# Altium PCB LittleFOC-pcb-0.0.2.PcbDoc
Units mil, origin at the board's own origin, x right, y up, seen from the top; angles counter-clockwise.
Board outline 670.03 x 1010.03 mil, 2 copper layers (Top Layer, Bottom Layer); 26 components, 35 nets, 119 pads, 19 vias.
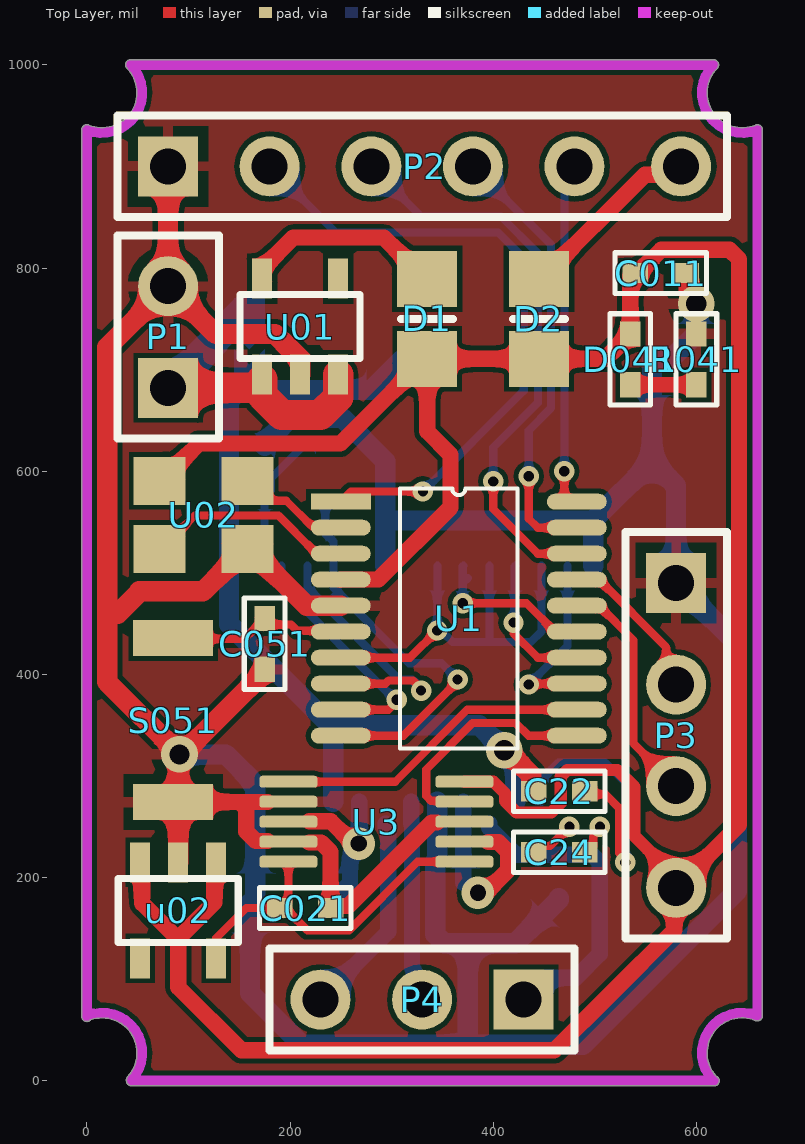
[diagram p0: Top Layer view]
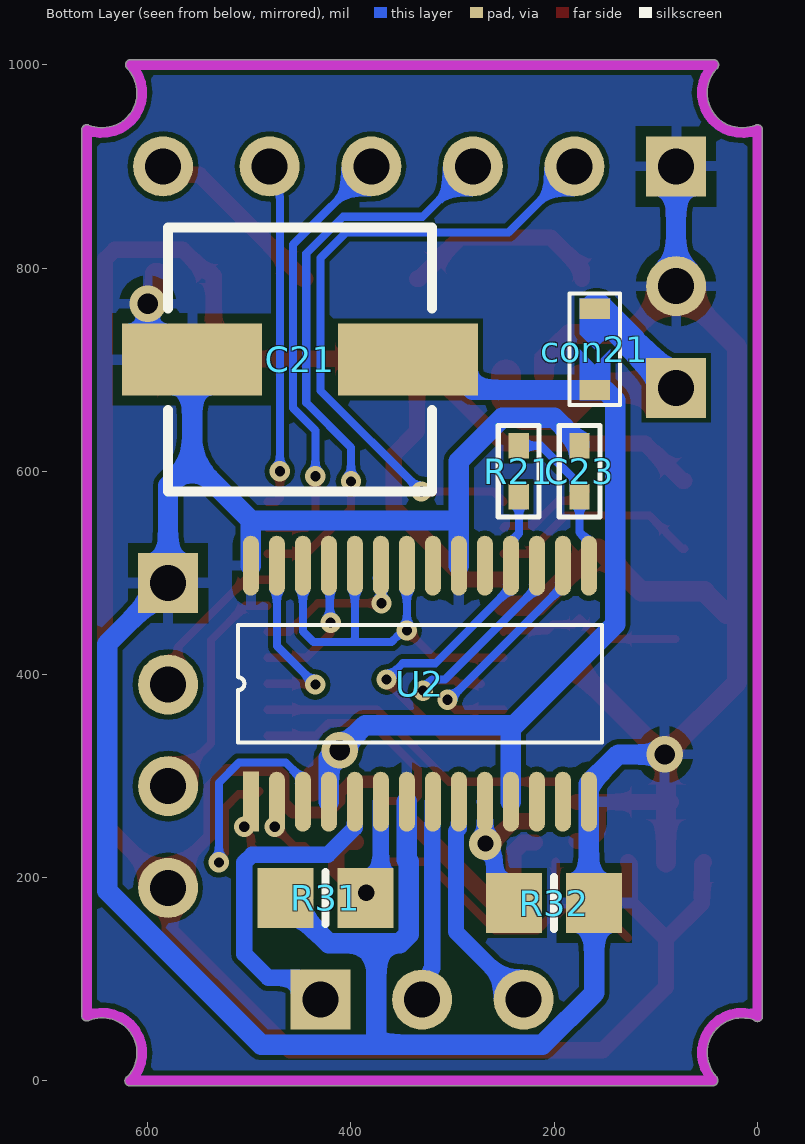
[diagram p1: Bottom Layer view, seen from below]

## Layer stack, top to bottom
Top Solder: solder mask 0.4, Solder Resist, Dk 3.5
Top Layer: signal copper 1.4
Dielectric 1: dielectric 12.6, FR-4, Dk 4.8
Bottom Layer: signal copper 1.4
Bottom Solder: solder mask 0.4, Solder Resist, Dk 3.5

## Board outline
3.71,59.99 cw(c0,63.37) -5.01,63.37 -5.01,936.06 cw(c0,936.06) 1.92,940.69 ccw(c15.04,972.44) 49.39,972.44 ccw(c15.04,972.44) 39.6,996.46 ccw(c15.04,972.44) 39.57,996.49 39.6,996.46 cw(c43.16,1000) 38.14,1000 cw(c43.16,1000) 43.19,1005.01 616.84,1005.01 cw(c616.84,1000) 621.86,1000 cw(c616.84,1000) 620.41,996.47 cw(c644.96,972.44) 620.43,996.49 620.41,996.47 ccw(c644.96,972.44) 658.08,940.69 cw(c660,936.06) 665.01,936.06 cw(c660,936.06) 665.01,936.06 665.01,63.94 cw(c660,63.94) 658.08,59.31 ccw(c644.96,27.56) 619.38,4.63 cw(c617.45,0) 622.46,0 cw(c617.45,0) 617.45,-5.01 611.22,-5.01 cw(c611.22,0) 611.22,-5.01 611.22,-5.02 ccw(c611.22,0) 611.26,-5.01 611.22,-5.02 44.04,-5.02 cw(c44.04,0) 39.04,0.47 cw(c44.04,0.93) 40.34,4.32 ccw(c15.04,27.56) 49.39,27.56 ccw(c15.04,27.56)

## Design rules (kind name [scope] priority, off if disabled: settings)
Clearance chip_pin [HasFootprint('QFN24')] p1: gap=5 ignorepadtopadclearanceinfootprint=FALSE
Clearance [All] p2: gap=5 ignorepadtopadclearanceinfootprint=FALSE
HoleSize [All] p1: absolutevalues=TRUE maxlimit=20 minlimit=10 maxpercent=80.000 minpercent=20.000
PolygonConnect [All] p1: connectstyle=Relief reliefconductorwidth=10 reliefentries=4 polygonreliefangle="90 Angle" airgapwidth=10
RoomDefinition LittleFOC-pcb-0.0.2 [InComponentClass('LittleFOC-pcb-0.0.2')] p1: confinementstyle=ConfineIn formatcopy=TRUE lockcomponents=FALSE outline 0,0 660,0 660,1000 0,1000
RoutingVias [All] p1: holewidth=10 width=20 viastyle="Through Hole" minholewidth=10 minwidth=20 maxholewidth=20 maxwidth=40
SolderMaskExpansion [All] p1: expansion=4 istentingtop=FALSE
Width VCC [InNet('VCC')or InNet('VCC_in')] p1: maxlimit=30 minlimit=20 preferedwidth=20
Width GND [InNet('GND')] p2: maxlimit=30 minlimit=8 preferedwidth=20
Width Power [(InNet('OUTPUT1') OR InNet('OUTPUT2') OR InNet('OUTPUT3') OR InNet('3V3')  OR InNet('PGND1') OR InNet('PGND3')  OR InNet('NetC011_1') OR InNet('NetD1_1')  OR InNet('NetD2_1'))] p3: maxlimit=20 minlimit=10 preferedwidth=15
Width signal [All] p4: maxlimit=15 minlimit=8 preferedwidth=8
29 further rules are at their usual default settings.

## Components (designator, comment, footprint, x,y, rotation, side; value= is the part's Value field where it differs from the comment)
C011 "Cap" 0402R 565,795 r0 top value=10uF
C021 "Cap" 0402R 215,170 r0 top value=1uF
C21 "Cap" XT_100UF_25V 450,710 r0 bottom locked value=100uF/25V
C22 "Cap" 0402R 465,285 r0 top value=0.1uF
C23 "Cap" 0402R 175,600 r90 bottom value=0.47uF
C24 "Cap" 0402R 465,225 r180 top value=0.01uF
C051 "Cap" 0402R 175,430 r270 top value=0.1μF
con21 "connector" connector 160,720 r270 bottom
D1 "Diode" 6-0805_M 335,750 r270 top
D2 "Diode" 6-0805_M 445,750 r270 top
D041 "LED2" 0402R 535,710 r270 top
P1 "Header 2" HDR1X2 80,682.12 r90 top
P2 "Header 6" HDR1X6 80,900 r0 top locked
P3 "Header 4" HDR1X4 580,490 r270 top locked
P4 "Header 3" HDR1X3 430,80 r180 top locked
R21 "Res1" 0402R 235,600 r270 bottom value=10K
R31 "Res1" 6-0805_M 425,180 r0 bottom value="20m 0.1W"
R32 "Res1" 6-0805_M 200,175 r180 bottom value="20m 0.1W"
R041 "Res1" 0402R 600,710 r270 top value=1K
S051 "SW-PB" MPTCFP2 85,355 r90 top
U01 "SPX3819" SOT23-5 172.6,695 r180 top
U1 "STM32G030F6P6" TSSOP20 250,570 r0 top
u02 "LP3992-15B5F" SOT23-5 127.4,215 r0 top
U02 "OSC 16Mhz" SMD3225 115,557.08 r0 top
U2 "DRV8313" TSSOP28 498.54,274.72 r90 bottom
U3 "INA2181A2IDSQR" VSSOP-10pin 285,255 r0 top

## Footprints (in the part's own frame and the unit in brackets; to place one, negate y for a bottom-side part, rotate by r counter-clockwise, add the part's x,y. Pads: shape width x height; smd on the part's side, far side on the other; paste and mask are expansions set on the pad)
6-0805_M [mm] "Chip Resistor, Body 2.0x1.2mm, IPC Low Density"
  rect 1.4x1.5 smd: 1(-1,0) 2(1,0)
  silkscreen extent 0,-0.65 0,0.65, body extent -1.07,-0.7 1.07,0.7, height 0.7
0402R [mil]
  rect 25x20 smd: 1(-25,0) 2(25,0)
  silkscreen extent -45,-20 45,20
connector [mil]
  rect 20x30 smd: 1(-40,0) 2(40,0)
  Top Layer region: -50,15 -50,-15 -15,-15 0,0 -15,15
  Top Layer region: 50,15 50,-15 0,-15 15,0 0,15
  silkscreen extent -55,-25 55,25
HDR1X2 [mm] "Connector; Header; 2 Position"
  rect 1.5x1.5 hole 0.9: 1(0,0)
  round 1.5 hole 0.9: 2(2.54,0)
  silkscreen extent -1.27,-1.27 3.81,1.27
HDR1X3 [mm] "Connector; Header; 3 Position"
  rect 1.5x1.5 hole 0.9: 1(0,0)
  round 1.5 hole 0.9: 2(2.54,0) 3(5.08,0)
  silkscreen extent -1.27,-1.27 6.35,1.27
HDR1X4 [mm] "Connector; Header; 4 Position"
  rect 1.5x1.5 hole 0.9: 1(0,0)
  round 1.5 hole 0.9: 2(2.54,0) 3(5.08,0) 4(7.62,0)
  silkscreen extent -1.27,-1.27 8.89,1.27
HDR1X6 [mm] "Connector; Header; 6 Position"
  rect 1.5x1.5 hole 0.9: 1(0,0)
  round 1.5 hole 0.9: 2(2.54,0) 3(5.08,0) 4(7.62,0) 5(10.16,0) 6(12.827,0)
  silkscreen extent -1.27,-1.27 13.97,1.27
MPTCFP2 [mm]
  rect 0.9x2 smd: 1(-2.05,0) 2(2.05,0)
SMD3225 [mm]
  rect 1.3x1.2 smd: 1(-1.1,-0.85) 2(1.1,-0.85) 3(1.1,0.85) 4(-1.1,0.85)
SOT23-5 [mm]
  rect 0.5x1 smd: 1(0,0) 2(-0.95,0) 3(-1.9,0) 4(-1.9,-2.4) 5(0,-2.4)
  silkscreen extent -2.45,-2 0.55,-0.4
TSSOP20 [mm]
  rect 1.5x0.4 smd: 1(0,0)
  oval 1.5x0.4 smd: 2(0,-0.65) 3(0,-1.3) 4(0,-1.95) 5(0,-2.6) 6(0,-3.25) 7(0,-3.9) 8(0,-4.55) 9(0,-5.2) 10(0,-5.85) 11(5.9,-5.85) 12(5.9,-5.2) 13(5.9,-4.55) 14(5.9,-3.9) 15(5.9,-3.25) 16(5.9,-2.6) 17(5.9,-1.95) 18(5.9,-1.3) 19(5.9,-0.65) 20(5.9,0)
  silkscreen extent 1.48,-6.18 4.42,0.33
TSSOP28 [mm]
  rect 1.5x0.4 smd: 1(0,0)
  oval 1.5x0.4 smd: 2(0,-0.65) 3(0,-1.3) 4(0,-1.95) 5(0,-2.6) 6(0,-3.25) 7(0,-3.9) 8(0,-4.55) 9(0,-5.2) 10(0,-5.85) 11(0,-6.5) 12(0,-7.15) 13(0,-7.8) 14(0,-8.45) 15(5.9,-8.45) 16(5.9,-7.8) 17(5.9,-7.15) 18(5.9,-6.5) 19(5.9,-5.85) 20(5.9,-5.2) 21(5.9,-4.55) 22(5.9,-3.9) 23(5.9,-3.25) 24(5.9,-2.6) 25(5.9,-1.95) 26(5.9,-1.3) 27(5.9,-0.65) 28(5.9,0)
  silkscreen extent 1.48,-8.78 4.42,0.33
VSSOP-10pin [mm]
  rrect50% 1.45x0.3 smd: 1(-2.2,1) 2(-2.2,0.5) 3(-2.2,0) 4(-2.2,-0.5) 5(-2.2,-1) 6(2.2,-1) 7(2.2,-0.5) 8(2.2,0) 9(2.2,0.5) 10(2.2,1)
XT_100UF_25V [mm]
  rect 3.5x1.8 smd: 1(-2.7,0) 2(2.7,0)
  silkscreen extent -3.3,-3.3 3.3,3.3

## Part data
C011 C021 C21 C22 C23 C24 C051: library part "Cap Semi", "Capacitor (Semiconductor SIM Model)", LatestRevisionDate=29-May-2009, LatestRevisionNote="IPC-7351 Footprint Added.", PackageDescription="Chip Capacitor", PackageReference=C1206, Published=8-Jun-2000, Publisher="Altium Limited"
D1 D2: "Default Diode", Code_JEDEC=DO-214-AB, LatestRevisionDate=17-Jul-2002, LatestRevisionNote="Re-released for DXP Platform.", PackageDescription="DO-214-AB/SMC; 2 C-Bend Leads; Body 7.9 x 5.9 mm, inc. leads (LxW)", PackageReference=SMC, PackageVersion=Sep-1996, Published=8-Jun-2000, Publisher="Altium Limited"
D041: "Typical RED, GREEN, YELLOW, AMBER GaAs LED", LatestRevisionDate=17-Jul-2002, LatestRevisionNote="Re-released for DXP Platform.", PackageDescription="SM LED; 2 Flat Leads", PackageReference=3.2X1.6X1.1, PackageVersion=Feb-2002, Published=8-Jun-2000, Publisher="Altium Limited"
P1: "Header, 2-Pin", LatestRevisionDate=17-Jul-2002, LatestRevisionNote="Re-released for DXP Platform.", Publisher="Altium Limited"
P2: "Header, 6-Pin", LatestRevisionDate=17-Jul-2002, LatestRevisionNote="Re-released for DXP Platform.", Publisher="Altium Limited"
P3: "Header, 4-Pin", LatestRevisionDate=17-Jul-2002, LatestRevisionNote="Re-released for DXP Platform.", Publisher="Altium Limited"
P4: "Header, 3-Pin", LatestRevisionDate=17-Jul-2002, LatestRevisionNote="Re-released for DXP Platform.", Publisher="Altium Limited"
R21 R31 R32 R041: "Resistor", LatestRevisionDate=17-Jul-2002, LatestRevisionNote="Re-released for DXP Platform.", PackageDescription="Axial Device, Thru-Hole; 2 Leads; 0.3 in Pin Spacing", PackageReference=AXIAL-0.3, Published=8-Jun-2000, Publisher="Altium Limited"
S051: "Switch", LatestRevisionDate=17-Jul-2002, LatestRevisionNote="Re-released for DXP Platform.", PackageDescription="Switch; 2 Leads", PackageReference=SPST-2, Published=24-Mar-1999, Publisher="Altium Limited"

## Via types
v1: diameter 20, hole 10, Top Layer to Bottom Layer, 14 vias
v2: diameter 36, hole 20, Top Layer to Bottom Layer, 3 vias
v3: diameter 32, hole 16, Top Layer to Bottom Layer, 2 vias

## Nets (pads, with @x,y where several pads share a name; then routed paths per layer and width w, separated by ;. In a path a pad name is that pad's centre, name@x,y a point inside that pad or via, vN(x,y) a via of type N, cw(c..) or ccw(c..) an arc to the next point about the centre after c; other vN are vias at no path point)
1V5: C021.1 u02.5 U3.5 U3.6 | length 344.1
  Top Layer w8: 127.4,140.51 156.89,170 C021.1 ; U3.5 198.39,176 192.39,170 C021.1 ; U3.6 325.63,215.63 257.94,147.94 217.06,147.94 201,164 196,164 C021.1
3V3: C011.1 D1.2 D2.2 D041.1 P3.4 U1.4 u02.1 u02.3 U02.4 U3.10 | length 2811.9
  Top Layer w12: U3.10 371.71,294.28 400.3,294.28 411.62,282.95 411.62,275.32 422.94,264 457.06,264 466.5,273.44 466.5,299.56 472.94,306 522.16,306 539,289.16 539,241 580,200 P3.4
  Top Layer w16: u02.3 54.44,213.16 54.44,174.8 90,139.24 ; U02.4 73.66,590.55 110.28,627.17 249.57,627.17 333.03,710.63 D1.2 ; 89.62,139.62 125.56,175.56 125.56,213.16 u02.1 ; 90,135 90,92.2 152.2,30 460,30 515.88,85.88 578.15,148.15 578.15,188.15 P3.4 585,195 642,252 642,808.63 632.63,818 565.5,818 544.5,797 542,797 C011.1 537.5,795 535,792.5 535,732.5 533,730.5 530.5,730.5 510.63,710.63 D2.2 D1.2 ; U1.4 250.13,493.35 287.02,493.35 358,564.34 358,616.2 335,639.2 D1.2
ADC1_IN4: U1.11 U3.9 | length 238.5
  Top Layer w8: U3.9 370.78,275.52 338.76,275.52 334.07,280.2 334.07,306.47 379.6,352 399.48,352 399.76,352.28 422.12,352.28 434.71,339.68 U1.11
ADC1_IN5: U1.12 U3.1 | length 313.3
  Top Layer w8: U3.1 303.58,294.37 374.49,365.28 U1.12
BLDC_EN: U1.7 U2.22 U2.24 U2.26 | length 422
  Top Layer w8: U1.7 318.21,416.46 v1(345,443.25)
  Bottom Layer w8: U2.22 v1(345,443.25) 348.25,443.25 353.95,437.54 354.41,437.54 359.95,432 399.18,432 ; U2.24 396.18,435 399.18,432 ; U2.26 447.36,442.36 437,432 399.18,432
GND: C011.2 C021.2 C21.2 C23.2 C051.2 P1.2 P2.1 P3.1 R31.2 R32.2 R041.1 S051.1 U01.2 U1.5 u02.2 U02.2 U2.7 U2.14 U2.20 U2.28 U3.2 U3.4 U3.8 | length 4275.4
  Top Layer w16: S051.1 85.2,274.49 90,274.49 150,274.49 ; U3.4@177.84,236.09 166.19,236.09 156.84,245.44 156.84,267.65 150,274.49 ; U3.2@177.84,274.49 150,274.49 ; U3.4@218.93,234.54 230.58,234.54 239.93,225.19 239.93,170.07 C021.2 242,172 257.2,172 339.42,254.22 U3.8@344.56,254.22
  Top Layer w20: 30.63,459.64 51.71,480.72 51.71,481.71 114.43,481.71 156.34,523.62 U02.2 160.28,523.62 216.25,467.64 U1.5 ; P2.1 P1.2 ; u02.2 90,274.49 v2@90,320 ; C051.2 175,402.5 93.75,321.25 v2(91.25,321.25) ; U01.2 210,710.25 185.25,735 127.12,735 P1.2 ; C011.2 592.5,795 v2@592.5,776.52 ; P1.2 20,722.12 20,392.5 v2(91.25,321.25) ; v2@90,320 v2(91.25,321.25) ; v2@90,320 v2(91.25,321.25)
  Bottom Layer w20: P1.2 P2.1 ; v2(91.25,321.25) 136.74,321.25 165.87,292.12 U2.14 165.87,180.24 R32.2 160.63,86.4 211.56,35.47 368.28,35.47 ; C23.2 175,627.5 200,652.5 251.21,652.5 293.82,609.89 293.82,507.48 294.06,507.24 U2.20 ; 295,555 298.47,551.53 380.07,551.53 380.11,551.49 389.96,551.49 390,551.53 498.54,551.53 ; U2.7 345,217.67 343.07,215.74 343.07,144.26 351.86,135.47 375,135.47 ; R31.2 464.37,178.03 421.81,135.47 375,135.47 ; U2.28 498.54,551.53 ; v2(600,764.69) 600,735.43 574.57,710 C21.2 556.3,609.29 ; 368.28,35.47 375,42.19 375,135.47 ; 368.28,35.47 488.44,35.47 640,187.03 640,430 P3.1 580,585.58 556.3,609.29 ; 498.54,551.53 556.3,609.29
I2C_SCL: P3.3 U1.16 | length 230.8
  Top Layer w8: U1.16 503.94,467.64 537.92,433.66 537.92,332.08 P3.3
I2C_SDA: P3.2 U1.17 | length 156.4
  Top Layer w8: U1.17 503.94,493.23 570.23,426.93 570.23,399.77 P3.2
NetC22_2: C22.2 U2.3 | length 294.8
  Top Layer w8: C22.2 493,282 510.7,282 524,268.7 524,224.25 530,218.25 v1(530,215)
  Bottom Layer w8: U2.3 447.36,296.37 464.24,313.25 510.15,313.25 530,293.39 v1(530,215)
NetC23_1: C23.1 R21.1 U2.15 | length 148.7
  Bottom Layer w8: U2.15@165.87,517.83 165.87,530.75 175,539.89 C23.1 181,581 181,593 213,625 R21.1
NetC24_1: C24.1 U2.1 | length 32.7
  Top Layer w8: C24.1 492.5,225 498.5,231 498.5,240.25 505,246.75 v1(505,250)
NetC24_2: C24.2 U2.2 | length 45.4
  Top Layer w8: C24.2 446,231 456,231 v1(475,250)
NetD1_1: D1.1 U01.5 | length 201.8
  Top Layer w16: U01.5 172.6,799.33 203.27,830 292.4,830 333.03,789.37 D1.1
NetD2_1: D2.1 P2.6 | length 185.8
  Top Layer w16: D2.1 446.97,789.37 549.36,891.76 576.76,891.76 P2.6
NetD041_2: D041.2 R041.2 | length 65
  Top Layer w15: D041.2 R041.2
nFAULT: R21.2 U1.10 U2.18 | length 389.4
  Top Layer w8: U1.10 311.55,339.68 365,393.13 v1(365,395)
  Bottom Layer w8: R21.2@235,572.5 234.68,572.18 234.68,538.71 242.64,530.75 242.64,485.35 316.97,411.01 348.99,411.01 v1(365,395)
nRESET: U1.9 U2.16 | length 240
  Top Layer w8: U1.9 297.03,365.28 305,373.25 v1(305,375)
  Bottom Layer w8: U2.16 191.46,486.95 303.4,375 v1(305,375)
nSLEEP: U1.8 U2.17 | length 240.2
  Top Layer w8: U1.8@272.07,390.87 294,390.87 297.13,394 321,394 329.06,385.94 v1(329.06,384.06)
  Bottom Layer w8: U2.17 217.05,485.35 307.4,395 320,395 329.06,385.94 v1(329.06,384.06)
NSRT: C051.1 S051.2 U1.6 | length 182.9
  Top Layer w8: S051.2@80.71,435 155,435 C051.1 180.96,449.04 200.96,449.04 206.92,443.08 248.97,443.08 U1.6
OSC_EN: U1.3 U02.1 | length 207.3
  Top Layer w8: U02.1 73.66,523.62 106.28,556.24 188.76,556.24 222.31,522.69 222.38,522.69 226.25,518.82 U1.3
OSC_IN: U1.2 U02.3 | length 96.3
  Top Layer w8: U02.3@168.54,580.31 177.93,570.92 196.35,570.92 221.39,545.89 248.52,545.89 U1.2
OUTPUT1: P4.1 U2.5 | length 310.5
  Bottom Layer w16: U2.5@396.18,253.19 396.18,249.14 422.79,222.53 497.31,222.53 504.93,214.91 504.93,124.93 481.53,101.53 451.53,101.53 P4.1
OUTPUT2: P4.2 U2.8 | length 199.1
  Bottom Layer w16: U2.8 319.41,253.32 320,252.73 320,110.9 321.76,109.14 321.76,88.24 P4.2
OUTPUT3: P4.3 U2.9 | length 202
  Bottom Layer w16: P4.3 296.7,146.7 296.7,245.55 293.94,248.3 U2.9@293.94,253.19
PGND1: R31.1 U2.6 U3.7 | length 160.1
  Top Layer w16: v3(385,185) 388.06,188.06 395.15,188.06 414.5,207.41 414.5,225.63 405.13,235 U3.7@395,235
  Bottom Layer w16: R31.1@370.59,195.04 U2.6
PGND3: R32.1 U2.10 U3.3 | length 174.6
  Top Layer w16: U3.3@218.93,255.54 240.18,255.54 262.18,233.53 v3(267.7,233.53)
  Bottom Layer w16: R32.1 258.93,194.56 258.93,220.43 267.7,229.2 v3(267.7,233.53) ; v3@268.1,228.38 268.1,274.59 U2.10
SYS_SWCLK: P2.4 U1.19 | length 438.7
  Top Layer w8: v1(435,595) 435,553.25 443.84,544.41 U1.19
  Bottom Layer w8: P2.4 457,823 457,662.05 435,640.05 v1(435,595)
SYS_SWDIO: P2.3 U1.18 | length 569.9
  Top Layer w8: v1(400,590) 400,562.66 443.84,518.82 U1.18
  Bottom Layer w8: P2.3 329.54,850.46 407.92,850.46 444,814.39 444,667.44 400,623.44 v1(400,590)
TIM3_CH1: U1.13 U2.27 | length 180.4
  Top Layer w8: v1(435,390) 435.87,390.87 U1.13
  Bottom Layer w8: v1(435,390) 472.95,427.95 U2.27
TIM3_CH2: U1.14 U2.25 | length 139.6
  Top Layer w8: v1(420,451) 420,440.29 443.84,416.46 U1.14
  Bottom Layer w8: v1(420,451) 420,454 420.89,454.89 420.89,506.12 U2.25
TIM3_CH3: U1.15 U2.23 | length 168.2
  Top Layer w8: v1(370,470) 432.68,470 460.63,442.05 U1.15
  Bottom Layer w8: v1(370,470) U2.23@370,490 ; U2.23 370,506.41 U2.23@370,490 ; U2.23@375,495 U2.23@370,490
USART1_RX: P2.2 U1.1 | length 643.3
  Top Layer w8: U1.1 260,580 v1(330.76,580)
  Bottom Layer w8: P2.2 245,835 405,835 430,810 430,679.24 v1(330.76,580)
USART1_TX: P2.5 U1.20 | length 344.3
  Top Layer w8: v1(470,600) 470,573.58 473.58,570 U1.20
  Bottom Layer w8: v1(470,600) 470,869.79 470.23,870.02 470.23,890.23 P2.5
VCC: con21.1 P1.1 U01.1 U01.3 | length 323.1
  Top Layer w30: P1.1 159.24,682.12 ; U01.1@172.6,690.31 172.6,682.12 172.6,674.59 191.87,655.31 229.83,655.31 247.4,672.89 U01.3
  Bottom Layer w30: P1.1@82.12,680 P1.1 125,727.12 125,728.28 156.72,760 con21.1
VCC_in: C21.1 C22.1 con21.2 U2.4 U2.11 | length 952
  Top Layer w20: v2(410.94,325.28) 413.03,325.28 437.5,300.8 437.5,285 C22.1
  Bottom Layer w20: U2.11 242.64,346.87 239.51,350 ; C21.1 310.24,710 280.24,680 150,680 140,670 140,449.51 239.51,350 ; U2.4 421.77,318.28 420.06,320 414.78,325.28 v2(410.94,325.28) 386.22,350 239.51,350
pads on no net: U01.4 u02.4 U2.12 U2.13 U2.19 U2.21

## Polygon pours and split planes (outlines as drawn)
GND on Top Layer "Top Layer-No Net" (solid, pour order 0): 3.71,59.99 cw(c0,63.37) -5.01,63.37 -5.01,936.06 cw(c0,936.06) 1.92,940.69 ccw(c15.04,972.44) 49.39,972.44 ccw(c15.04,972.44) 39.6,996.46 ccw(c15.04,972.44) 39.57,996.49 39.6,996.46 cw(c43.16,1000) 38.14,1000 cw(c43.16,1000) 43.19,1005.01 616.84,1005.01 cw(c616.84,1000) 621.86,1000 cw(c616.84,1000) 620.41,996.47 cw(c644.96,972.44) 620.43,996.49 620.41,996.47 ccw(c644.96,972.44) 658.08,940.69 cw(c660,936.06) 665.01,936.06 cw(c660,936.06) 665.01,936.06 665.01,63.94 cw(c660,63.94) 658.08,59.31 ccw(c644.96,27.56) 619.38,4.63 cw(c617.45,0) 622.46,0 cw(c617.45,0) 617.45,-5.01 611.22,-5.01 cw(c611.22,0) 611.22,-5.01 611.22,-5.02 ccw(c611.22,0) 611.26,-5.01 611.22,-5.02 44.04,-5.02 cw(c44.04,0) 39.04,0.47 cw(c44.04,0.93) 40.34,4.32 ccw(c15.04,27.56) 49.39,27.56 ccw(c15.04,27.56)
GND on Bottom Layer "Top Layer-No Net1" (solid, pour order 1): 3.71,59.99 cw(c0,63.37) -5.01,63.37 -5.01,936.06 cw(c0,936.06) 1.92,940.69 ccw(c15.04,972.44) 49.39,972.44 ccw(c15.04,972.44) 39.6,996.46 ccw(c15.04,972.44) 39.57,996.49 39.6,996.46 cw(c43.16,1000) 38.14,1000 cw(c43.16,1000) 43.19,1005.01 616.84,1005.01 cw(c616.84,1000) 621.86,1000 cw(c616.84,1000) 620.41,996.47 cw(c644.96,972.44) 620.43,996.49 620.41,996.47 ccw(c644.96,972.44) 658.08,940.69 cw(c660,936.06) 665.01,936.06 cw(c660,936.06) 665.01,936.06 665.01,63.94 cw(c660,63.94) 658.08,59.31 ccw(c644.96,27.56) 619.38,4.63 cw(c617.45,0) 622.46,0 cw(c617.45,0) 617.45,-5.01 611.22,-5.01 cw(c611.22,0) 611.22,-5.01 611.22,-5.02 ccw(c611.22,0) 611.26,-5.01 611.22,-5.02 44.04,-5.02 cw(c44.04,0) 39.04,0.47 cw(c44.04,0.93) 40.34,4.32 ccw(c15.04,27.56) 49.39,27.56 ccw(c15.04,27.56)

## Keep-outs
Keep-Out Layer:
  lines w10: 0,63.37 0,936.06 ccw(c15.04,972.44) 43.16,1000 616.84,1000 ccw(c644.96,972.44) 660,936.06 660,63.94 ccw(c644.96,27.56) 616.84,0 ; 0,63.94 cw(c15.04,27.56) 44.04,0.93 ; 44.04,0 611.22,0 ; 617.45,0 611.22,0 ; 611.22,0 611.22,0